# Altium PCB Emetteur.PcbDoc
Units mil, origin at the board's own origin, x right, y up, seen from the top; angles counter-clockwise.
Board outline 3820 x 1875 mil, 2 copper layers (Top Layer, Bottom Layer); 49 components, 25 nets, 112 pads, 24 vias.
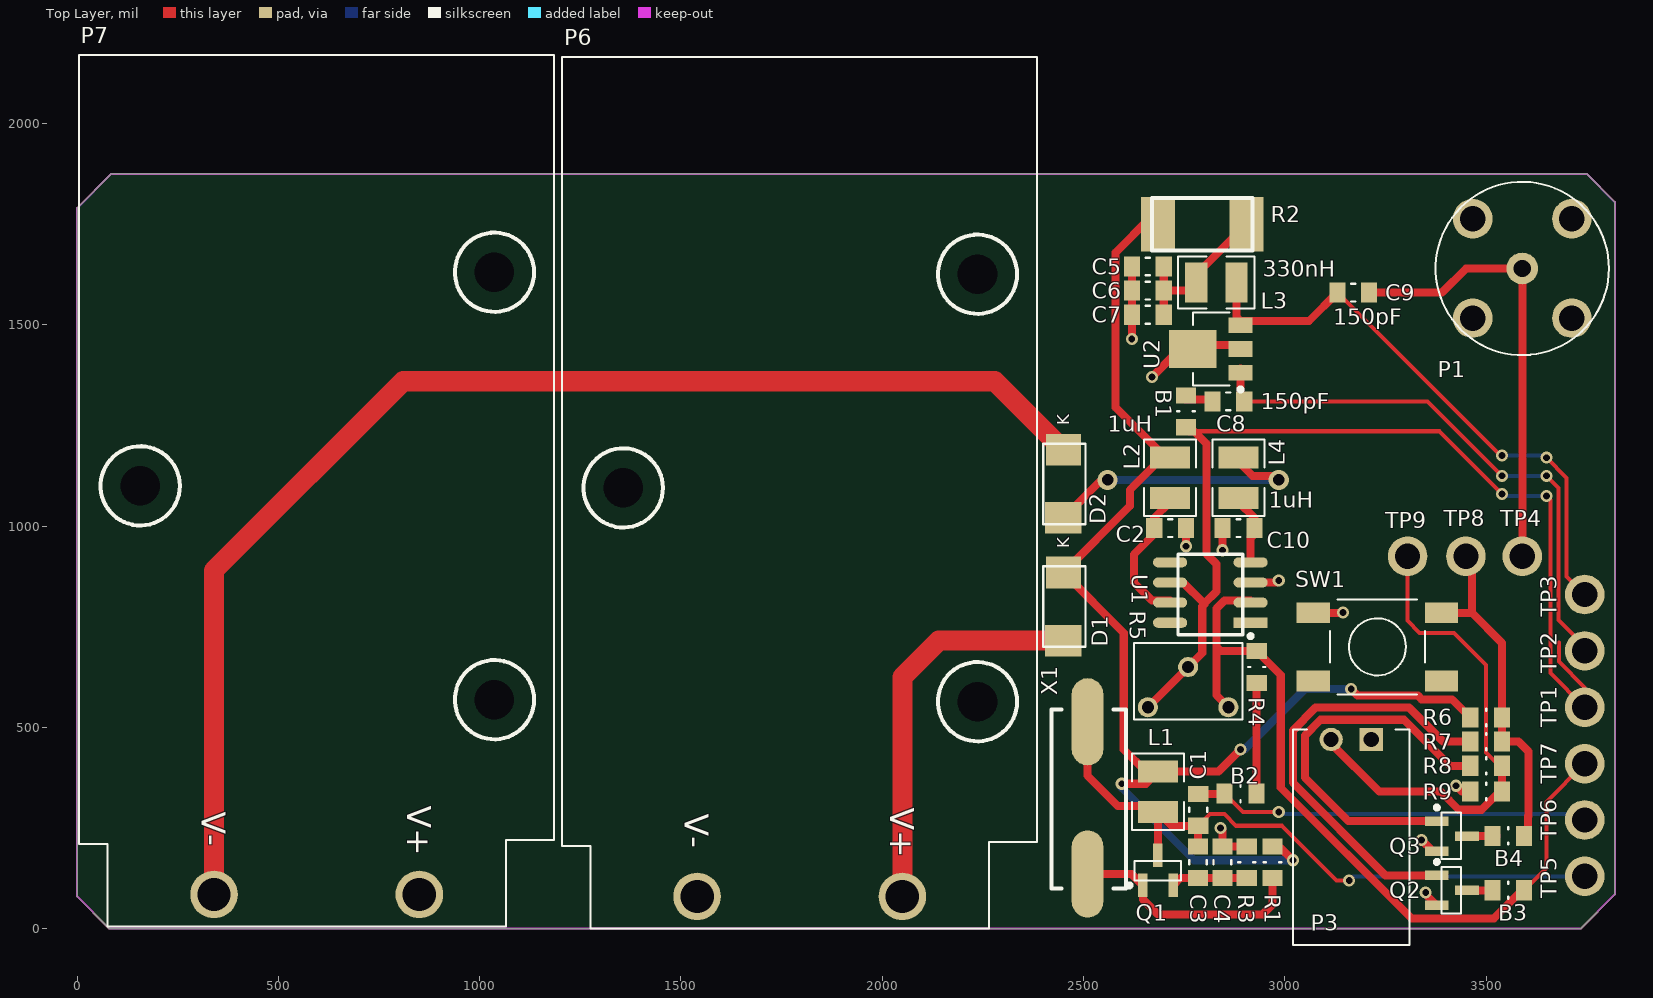
[diagram p0: Top Layer view]
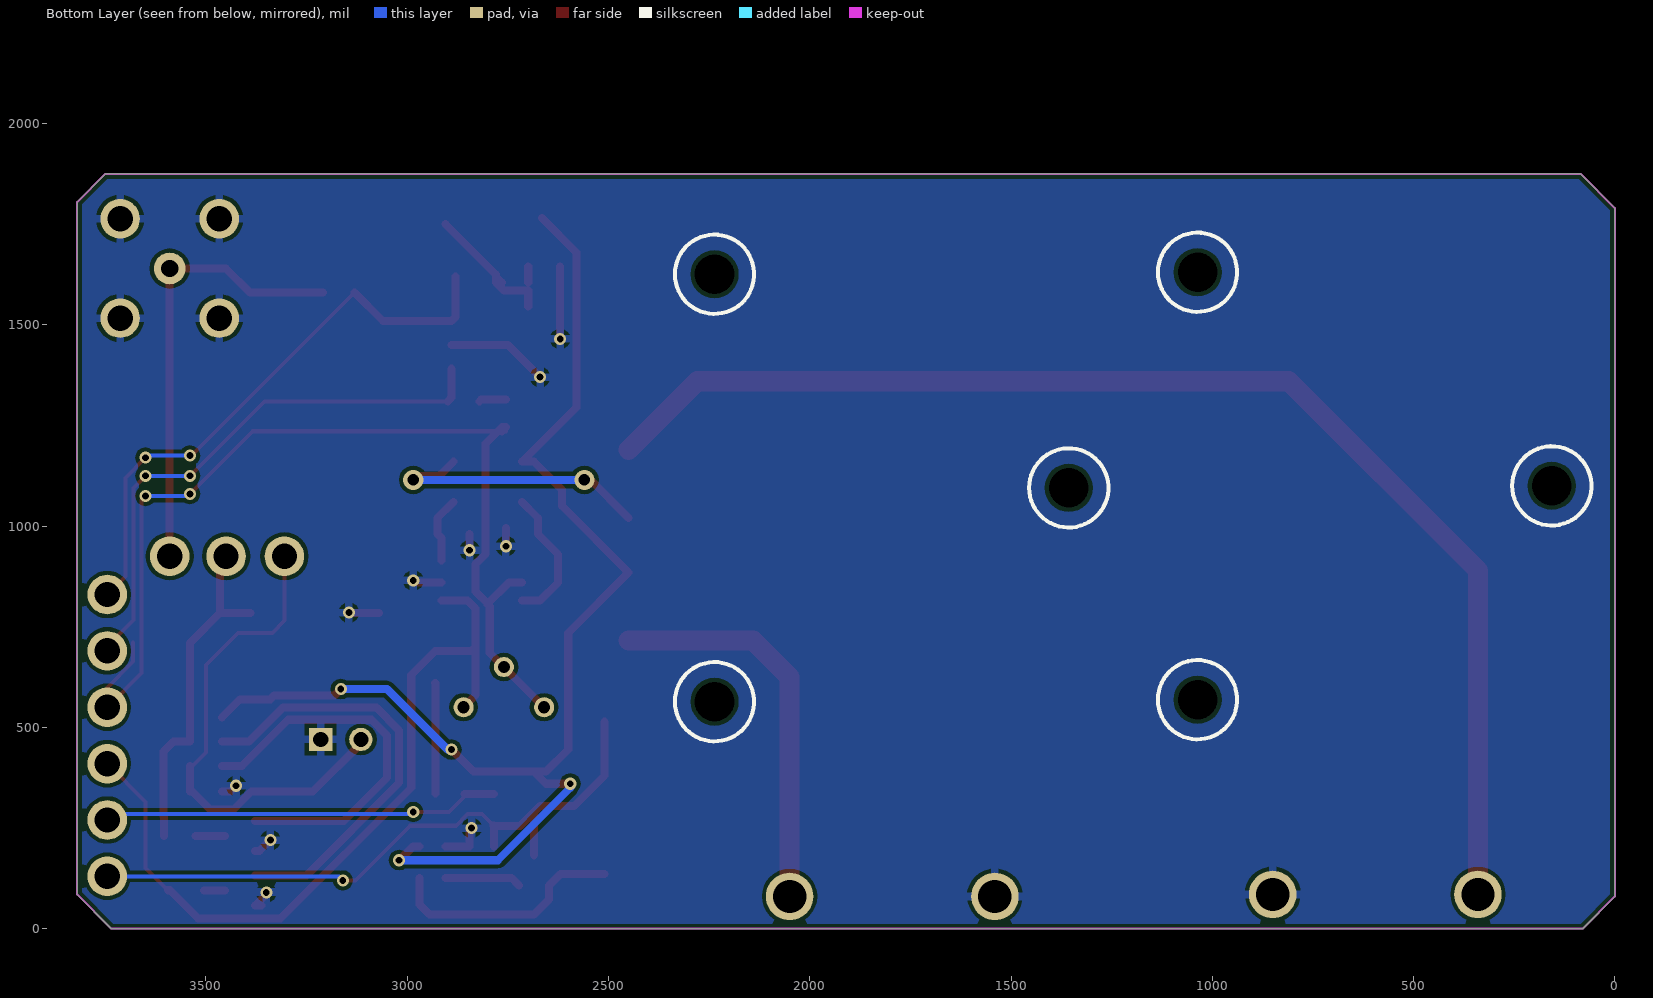
[diagram p1: Bottom Layer view, seen from below]
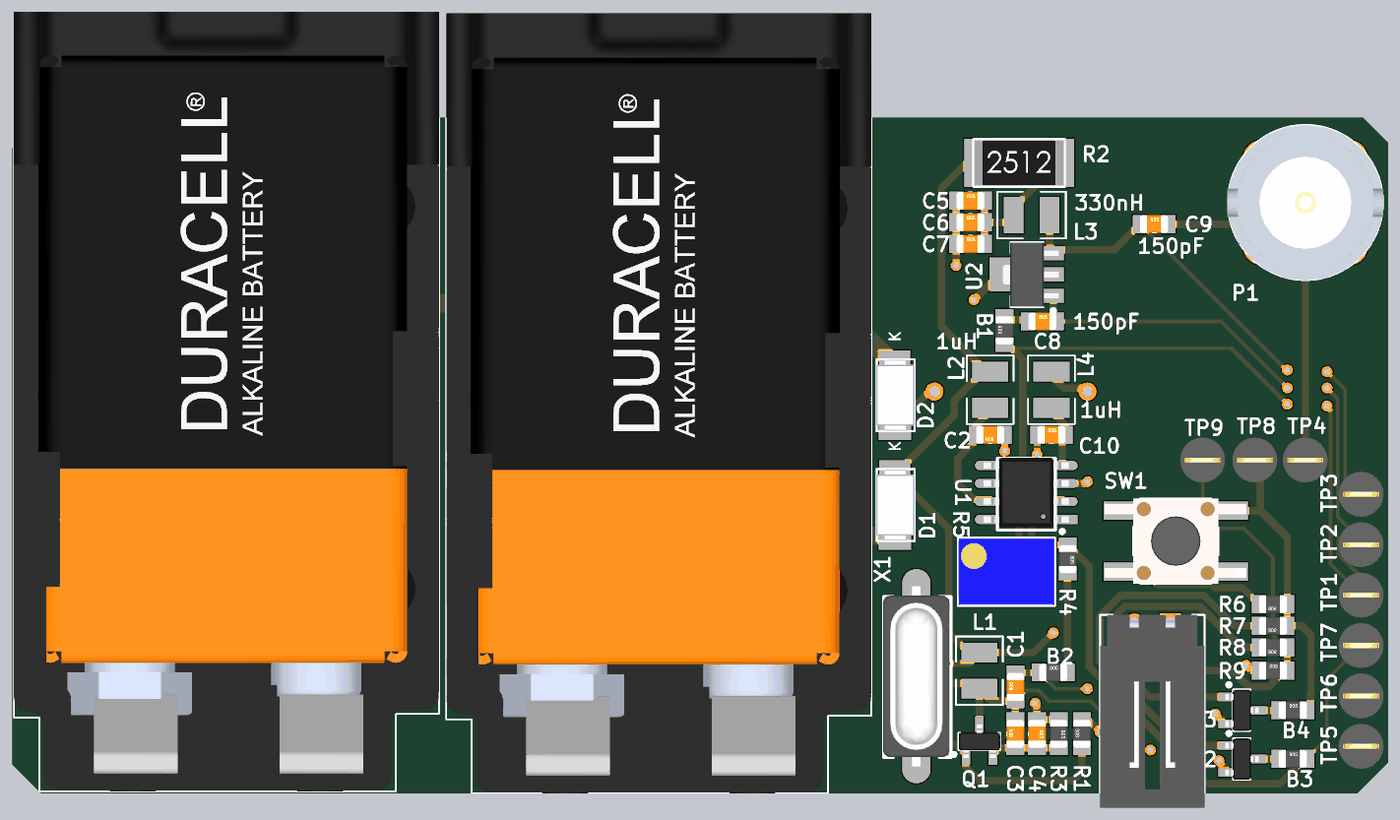
[diagram p2: 3D render of the assembled board from above, using the file's embedded part models]

## Layer stack, top to bottom
Top Layer: signal copper 1.4
Dielectric: dielectric 12.6, FR-4, Dk 4.8
Bottom Layer: signal copper 1.4

## Board outline
0,80 80,0 3735,0 3820,85 3820,1805 3750,1875 85,1875 0,1790

## Design rules (kind name [scope] priority, off if disabled: settings)
Clearance [All] p1: gap=10
MinimumSolderMaskSliver [All] p1 off: minsoldermaskwidth=10
PolygonConnect [All] p1: connectstyle=Relief reliefconductorwidth=20 reliefentries=4 polygonreliefangle="90 Angle"
RoutingVias [All] p1: holewidth=17 width=30 viastyle="Through Hole" minholewidth=17 minwidth=30 maxholewidth=28 maxwidth=50
SilkToSilkClearance [All] p1 off: silktosilkclearance=10
SilkscreenOverComponentPads [All] p1 off: minsilkscreentomaskgap=10
SolderMaskExpansion [All] p1: expansion=4
Width [All] p1: maxlimit=50 minlimit=10 preferedwidth=20
25 further rules are at their usual default settings.

## Components (designator, comment, footprint, x,y, rotation, side; value= is the part's Value field where it differs from the comment)
B1 "0" "0805 - Resistor" 2755,1285 r90 top
B2 "0" "0805 - Resistor" 2890,335 r0 top
B3 "0" "0805 - Resistor" 3555,95 r0 top
B4 "0" "0805 - Resistor" 3555,230 r0 top
C1 "Cap" "0805 - Cap Non-Polarized" 2785,295 r90 top
C2 "0.1uF" "0805 - Cap Non-Polarized" 2715,995 r180 top
C3 "Cap" "0805 - Cap Non-Polarized" 2784.61,165 r90 top
C4 "Cap" "0805 - Cap Non-Polarized" 2845,165 r270 top
C5 "2.2uF" "0805 - Cap Non-Polarized" 2660,1645 r0 top
C6 "1000pF" "0805 - Cap Non-Polarized" 2660,1585 r0 top
C7 "100pF" "0805 - Cap Non-Polarized" 2660,1525 r0 top
C8 "0.015uF" "0805 - Cap Non-Polarized" 2860,1310 r0 top
C9 "0.015uF" "0805 - Cap Non-Polarized" 3170,1580 r0 top
C10 "0.1uF" "0805 - Cap Non-Polarized" 2885,995 r0 top
D1 "Diode" "DOS-214AC (SMA)" 2450,800 r90 top
D2 "Diode" "DOS-214AC (SMA)" 2450,1105 r90 top
L1 "Inductor" "1008 - INDUCTOR" 2685,340 r90 top
L2 "1uH" "1008 - INDUCTOR" 2715,1120 r90 top
L3 "330nH" "1008 - INDUCTOR" 2830,1605 r180 top
L4 "1uH" "1008 - INDUCTOR" 2885,1120 r270 top
P1 "Coax-F" Coax-BNC-THT-Vertical 3590,1640 r0 top
P3 "Header 1X2" "Headers - 1x2 - R/A - Lock" 3215,470 r180 top
P6 "Battery Holder" "Battery Holder - 9V - THT" 2050,80 r270 top
P7 "Battery Holder" "Battery Holder - 9V - THT" 850,85 r270 top
Q1 "NPN" SOT23-3 2685,145 r90 top
Q2 "MOSFET_N" SOT23-3 3415,95 r0 top
Q3 "MOSFET_N" SOT23-3 3415,230 r0 top
R1 "Res" "0805 - Resistor" 2970,165 r90 top
R2 "36" "2512 - Resistor" 2795,1750 r0 top
R3 "Res" "0805 - Resistor" 2905,165 r270 top
R4 "2k" "0805 - Resistor" 2930,650 r270 top
R5 "Pot" TT-67Y 2660,550 r180 top
R6 "10k" "0805 - Resistor" 3500,525 r180 top
R7 "100" "0805 - Resistor" 3500,465 r180 top
R8 "100" "0805 - Resistor" 3500,405 r180 top
R9 "10k" "0805 - Resistor" 3500,340 r0 top
SW1 "Tact Switch 4" "TE FSMJSMA" 3230,700 r0 top
TP1 "TP" TP-THT-Vertical-1 3745,550 r0 top
TP2 "TP" TP-THT-Vertical-1 3745,690 r0 top
TP3 "TP" TP-THT-Vertical-1 3745,830 r0 top
TP4 "TP" TP-THT-Vertical-1 3590,925 r0 top
TP5 "TP" TP-THT-Vertical-1 3745,130 r0 top
TP6 "TP" TP-THT-Vertical-1 3745,270 r0 top
TP7 "TP" TP-THT-Vertical-1 3745,410 r0 top
TP8 "TP" TP-THT-Vertical-1 3450,925 r0 top
TP9 "TP" TP-THT-Vertical-1 3305,925 r0 top
U1 "LM7121" "SOIC8 - 0.150" 2915,760 r90 top
U2 "Buffer" SOT-89 2890,1440 r180 top
X1 "HC49US" HC49US 2510,325 r90 top

## Footprints (in the part's own frame and the unit in brackets; to place one, negate y for a bottom-side part, rotate by r counter-clockwise, add the part's x,y. Pads: shape width x height; smd on the part's side, far side on the other; paste and mask are expansions set on the pad)
"0805 - Cap Non-Polarized" [mil]
  rect 40x50 smd: 1(-39.38,-0.01) 2(39.36,-0.01)
  silkscreen extent -5,-22 5,22, body extent -39,-25 39,25, height 31
"0805 - Resistor" [mil]
  rect 40x50 smd: 1(-39.38,0.39) 2(39.36,0.39)
  silkscreen extent 0,-21 0,22, body extent -39,-24 39,25, height 31
"1008 - INDUCTOR" [mil]
  rect 55x100 smd: 1(-50,0) 2(50,0)
  silkscreen extent -95,-65 95,65, body extent -49,-39 49,39, height 71
"2512 - Resistor" [mil]
  rect 85x135 smd: 1(-110,0) 2(110,0)
  silkscreen extent -125,-65 125,65, body extent -124,-63 124,63, height 24
"Battery Holder - 9V - THT" [mm]
  round 3 hole 2.1: 1(0,0) 2(0,-12.95)
  round 2 hole 2.5 unplated: ""(-39.26,4.74) ""(-25.78,-17.61) ""(-12.29,4.74)
  Bottom Overlay keep-out circle w0.254: c-39.26,4.74 r2.5
  Bottom Overlay keep-out circle w0.254: c-12.29,4.74 r2.5
  Bottom Overlay keep-out circle w0.254: c-25.78,-17.61 r2.5
  silkscreen extent -52.96,-21.46 2.03,8.51, body extent -52.96,-21.46 2.03,8.51, height 21.31
Coax-BNC-THT-Vertical [mm]
  round 2 hole 1.1: 1(0,0)
  round 2.5 hole 1.6: 2(3.13,3.13) 3(-3.13,3.13) 4(-3.13,-3.13) 5(3.13,-3.13)
  silkscreen extent -5.46,-5.47 5.47,5.47, body extent -5.5,-5.52 5.5,5.48, height 13.7
"DOS-214AC (SMA)" [mm]
  rect 2x2.3 smd: 1(-2.148,0)
  rect 2x2.2 smd: 2(2.148,0)
  silkscreen extent -2.54,-1.4 2.54,1.27, body extent -2.5,-1.39 2.5,1.31, height 2.15
HC49US [mm]
  oval 5.5x2 smd: 1(-4.8,0) 2(4.8,0)
  silkscreen extent -5.71,-2.41 5.59,2.29, body extent -6.36,-2.35 6.34,2.35, height 4.2
"Headers - 1x2 - R/A - Lock" [mil]
  rect 58x58 hole 38: 1(0,0)
  round 58 hole 38: 2(100,0)
  silkscreen extent -95,-25 195,510, body extent -95,-25 195,510, height 280
"SOIC8 - 0.150" [mil]
  rect 25x85 smd: 1(0,0)
  oval 25x85 smd: 2(50,0) 3(100,0) 4(150,0) 5(150,200) 6(100,200) 7(50,200) 8(0,200)
  silkscreen extent -38,-5 170,180, body extent -21,-18 171,218, height 67
SOT23-3 [mm]
  rect 1.5x0.6 smd: 1(-0.95,0.95) 2(-0.95,-0.95) 3(0.95,0)
  silkscreen extent -1.07,-1.45 0.58,1.92, body extent -1.19,-1.46 1.15,1.46, height 1
SOT-89 [mm]
  rect 1.5x1 smd: 1(0,1.5) 2(0,0) 3(0,-1.5)
  rect 3x2.4 smd: 2(3,0)
  silkscreen extent -0.13,-2.3 3,2.67, body extent -0.38,-2.25 3.55,2.25, height 1.4
"TE FSMJSMA" [mm]
  rect 2.1x1.3 smd: 1(-4.05,2.15) 2(-4.05,-2.15) 3(4.05,2.15) 4(4.05,-2.15)
  silkscreen extent -3,-3 3,3, body extent -5,-3 5,3, height 5
TP-THT-Vertical-1 [mm]
  round 2.5 hole 1.6: 1(0,0)
  body extent -1.6,-1.59 1.57,1.59, height 5.65
TT-67Y [mil]
  round 50 hole 30: 1(0,0) 2(-100,-100) 3(-200,0)
  silkscreen extent -235,-160 35,30, body extent -234,-158 34,28, height 323

## Part data
B1 B2 B3 B4: library part Jumper-0805, "RES 0.0 OHM 1/8W JUMP 0805"
C1: library part Cap-TDK-CGA-150pF-0805, "CAP CER 150PF 250V 5% NP0 0603"
C2 C10: library part Cap-TDK-CGA-0.1uF-0805, "CAP CER 0.1UF 100V 10% X7R 0805"
C3: library part Cap-TDK-CGA-68pF-0805, "CAP CER 68PF 100V 5% NP0 0603"
C4: library part Cap-TDK-CGA-27pF-0805, "CAP CER 27PF 50V 5% NP0 0603"
C5: library part Cap-Samsung-CL-50V-2.2uF-0805-10%, "CAP CER 2.2UF 50V 10% X5R 0805"
C6: library part Cap-TDK-CGA-1000pF-0805, "CAP CER 1000PF 100V 5% NP0 0805"
C7: library part Cap-TDK-CGA-100pF-0805, "CAP CER 100PF 100V 5% NP0 0805"
C8 C9: library part Cap-TDK-CGA-0.015uF-0805, "CAP CER 0.015UF 100V X7R 0805"
D1 D2: library part S1M-13-F, "DIODE GEN PURPOSE 1000V 1A SMA"
L1: library part Murata-LQW2UA-Ind-AirCore-2.2uH, "IND 2200NH 280MA SRF 130MHZ 1008"
L2 L4: library part Murata-LQW2UA-Ind-AirCore-1uH, "IND 1000NH 370MA SRF 290MHZ 1008"
L3: library part Murata-LQW2UA-Ind-AirCore-330nH, "IND 330NH 450MA SRF 570MHZ 1008"
P1: library part coax-bnc-tht-vertical, "CONN BNC JACK STR 50 OHM PCB"
P3: library part Header-0.100-R/A-Lock-1X2
P6 P7: library part "Battery Holder-9V-THT-Open", "HOLDER BATTERY 9V PC MOUNT"
Q1: library part MMBT2222A-7-F, "TRANS NPN 40V 350MW SMD SOT23-3"
Q2 Q3: library part 2N7002, "MosFET Channel-N SOT-23-3 3.3A"
R1: library part Yagao-RC0805-100k, "RES 100K OHM 1/8W 5% 0805 SMD"
R2: library part Rohm-MCR100-36, "RES 36 OHM 1W 5% 2512 SMD"
R3 R7 R8: library part Yagao-RC0805-100, "RES 100 OHM 1/8W 5% 0805 SMD"
R4: library part Yagao-RC0805-2k, "RES 2.0K OHM 1/8W 5% 0805 SMD"
R5: library part Pot-TT67Y-20Turns-THT-10%-10k, "TRIMMER 10K OHM 0.5W TH"
R6 R9: library part Yagao-RC0805-10k, "RES 10K OHM 1/8W 5% 0805 SMD"
SW1: library part TactSwitch-SMD-Vertical-GullWing-6x6, "SWITCH TACTILE SPST-NO 0.05A 12V"
TP1 TP2 TP3 TP4 TP5 TP6 TP7 TP8 TP9: library part TP-THT-Vertical-1, "TEST POINT PC COMPACT .063\"D BLK"
U1: library part LM7121-8SOIC, "IC OPAMP VFB 175MHZ 8SOIC"
U2: library part HMC482ST89E-20dB, "IC MMIC AMP HBT 5GHZ SOT-89"
X1: library part TXC-9C-27MHz, "CRYSTAL 27MHZ 18PF SMD"

## Via types
v1: diameter 30, hole 17, Top Layer to Bottom Layer, 22 vias
v2: diameter 50, hole 28, Top Layer to Bottom Layer, 2 vias

## Nets (pads, with @x,y where several pads share a name; then routed paths per layer and width w, separated by ;. In a path a pad name is that pad's centre, name@x,y a point inside that pad or via, vN(x,y) a via of type N, cw(c..) or ccw(c..) an arc to the next point about the centre after c; other vN are vias at no path point)
+9V: D1.2 L1.2 L2.2 R1.2 R2.1 R6.2 | length 3274.7
  Top Layer w20: v1(2595,360) 2655,360 L1.2 ; R2.1@2665,1765 2580,1680 2580,1295 2715,1160 2685,1160 2615,1090 2615,1049.57 D1.2 2600,734.57 2600,445 2655,390 L1.2 ; v1(2890,445) 2835,390 L1.2 ; R1.2 2985.64,204.36 v1(3020,170) ; v1(3165,595) 3181,579 3330.59,579 3339.83,569.76 3415.49,569.76 R6.2
  Bottom Layer w20: v1(2595,360) 2595,350 2775,170 v1(3020,170) ; v1(2890,445) 2900,445 3050,595 v1(3165,595)
-9V: D2.1 L4.1 | length 692.8
  Top Layer w20: D2.1 2544.57,1115 v2(2560,1115) ; L4.1@2885,1160 2920,1125 2975,1125 v2(2985,1115)
  Bottom Layer w20: v2(2560,1115) v2(2985,1115)
COM: C2.1 C4.1 C5.1 C6.1 C7.1 C10.1 P1.2 P1.3 P1.4 P1.5 P3.1 P6.2 P7.1 Q2.2 Q3.2 R3.1 R9.1 SW1.1 U1.3 U2.2 | length 923.3
  Top Layer w20: v1(2620,1465) 2620.62,1465.62 C7.1 C6.1 C5.1 ; v1(2670,1370) 2750,1450 U2.2@2890,1450 ; C2.1 2755,994.38 v1(2755,950) ; v1(2840,250) 2844.99,245.01 C4.1 R3.1 ; v1(2845,940) 2845.62,940.62 C10.1@2845.62,979.99 ; U1.3 2980,860 v1(2985,865) ; SW1.1 3144.65,784.65 v1(3145,785) ; v1(3340,220) 3367.4,192.6 Q3.2 ; v1(3350,90) 3350,85.2 Q2.2 Q2.2@3362.4,57.6 ; v1(3425,355) 3439.61,340.39 R9.1
NetB1_1: B1.1 R5.1 R5.2 TP1.1 U1.6 | length 2637.7
  Top Layer w10: B1.1@2754.61,1235.62 2764.61,1235.62 2774.38,1235.62 3384.38,1235.62 v1(3540,1080) ; v1(3650,1075) 3660,1065 3660,635 TP1.1 3745,599.19 3680.79,663.4 3680.79,710.93
  Top Layer w20: R5.1 R5.2 2795,685 2795,800 2800,805 2800,807.43 ; U1.6 2747.43,860 2800,807.43 ; B1.1@2764.61,1235.62 B1.1 2764.38,1245.62 2774.38,1235.62 2805,1205 2805,930.5 2830,905.5 2830,837.43 2800,807.43
  Bottom Layer w10: v1(3540,1080) 3545,1075 v1(3650,1075)
NetB1_2: B1.2 C8.1 | length 67.8
  Top Layer w20: B1.2@2754.61,1314.36 2816.25,1314.36 C8.1
NetB2_1: B2.1 C1.2 TP6.1 | length 994.9
  Top Layer w10: B2.1 2851.65,334.36 2896.01,290 v1(2985,290)
  Top Layer w20: C1.2 2851.65,334.36 2857.55,334.36 B2.1@2858.19,335
  Bottom Layer w10: v1(2985,290) 2990,285 3730,285 TP6.1
NetB2_2: B2.2 R4.2 | length 275.7
  Top Layer w20: B2.2 2929.36,609.61 R4.2
NetB3_1: B3.1 Q2.3 | length 52.6
  Top Layer w20: Q2.3 B3.1@3505,95
NetB3_2: B3.2 R4.1 R5.3 TP7.1 U1.2 | length 1964
  Top Layer w10: B3.2 3650,151.02 3650,315 TP7.1
  Top Layer w20: R5.3 2830,580 2830,700 ; U1.2@2915,815 2850,815 2830,795 2830,700 ; B3.2 3588.91,95.39 3519.31,25.79 3314.36,25.79 2990,350.15 2990,629.76 R4.1 2840.62,689.38 2830,700
NetB4_1: B4.1 Q3.3 | length 73.4
  Top Layer w20: Q3.3 3525.24,230 B4.1@3525.62,230.39
NetB4_2: B4.2 R6.1 R7.1 SW1.3 TP8.1 | length 859.5
  Top Layer w20: SW1.3 3465.35,784.65 ; TP8.1 3465.35,909.65 3465.35,784.65 ; B4.2@3604.36,230.39 3604.36,279.36 3605,280 3605,440 3580.39,464.61 R7.1 R6.1 3539.38,709.38 3540,710 3465.35,784.65
NetC1_1: C1.1 C3.2 L1.1 Q1.3 TP5.1 X1.2 | length 1663.9
  Top Layer w10: C1.1 2814.38,285 2850,285 2879.38,255.62 2993.35,255.62 3128.98,120 v1(3160,120)
  Top Layer w20: X1.2 2510,380 2585,305 2670,305 L1.1 ; Q1.3 L1.1 ; C3.2 C1.1@2784.62,255.24 ; C1.1 C1.1@2784.62,255.24 ; L1.1 2719.76,255.24 C1.1@2784.62,255.24
  Bottom Layer w10: v1(3160,120) 3170,130 TP5.1
NetC2_2: C2.2 L2.1 U1.7 | length 345.9
  Top Layer w20: U1.7@2715,815 2670,815 2625,860 2625,929.37 2675.64,980.01 2675.64,1020.64 L2.1@2715,1060
NetC3_1: C3.1 C4.2 Q1.2 R3.2 | length 190.5
  Top Layer w20: Q1.2 2740.44,125.64 C4.2 R3.2
NetC5_2: C5.2 C6.2 C7.2 L3.2 R2.2 | length 386.9
  Top Layer w20: C7.2@2699.36,1544.99 C6.2 2759.99,1584.99 L3.2 L3.2@2780,1620 ; C6.2@2699.36,1604.99 C5.2 ; L3.2@2764.99,1604.99 L3.2@2780,1620 ; R2.2 2780,1625 L3.2@2780,1620
NetC8_2: C8.2 TP2.1 U2.1 | length 1401.4
  Top Layer w10: C8.2 3355.01,1309.99 v1(3540,1125) ; v1(3650,1125) 3680,1095 3680,766.57 3745,701.57 TP2.1 TP2.1@3730,690
  Top Layer w20: U2.1@2890,1390.94 2890,1319.36 C8.2
  Bottom Layer w10: v1(3540,1125) v1(3650,1125)
NetC9_1: C9.1 L3.1 TP3.1 U2.3 | length 1463.6
  Top Layer w10: C9.1 3535.62,1175 v1(3540,1175) ; v1(3650,1170) 3700,1120 3700,875 TP3.1
  Top Layer w20: L3.1@2880,1620 2880,1519.05 2890,1509.05 3059.68,1509.05 C9.1
  Bottom Layer w10: v1(3540,1175) 3655,1175 v1(3650,1170)
NetC9_2: C9.2 P1.1 TP4.1 | length 1120.5
  Top Layer w20: C9.2 3390.64,1579.99 3450.64,1640 P1.1 TP4.1
NetC10_2: C10.2 L4.2 U1.4 | length 165.2
  Top Layer w20: L4.2@2885,1060 2924.36,1020.64 2924.36,979.99 2915,970.63 U1.4@2915,915
NetD1_1: D1.1 P6.1 | length 982.5
  Top Layer w50: P6.1 2050,625 2140.43,715.43 D1.1
NetD2_2: D2.2 P7.2 | length 3180.2
  Top Layer w50: P7.2 340.16,890.16 810,1360 2279.57,1360 D2.2
NetP3_2: P3.2 R8.1 R9.2 TP9.1 | length 1256.3
  Top Layer w10: TP9.1 3305,765 3335,735 3420,735 3500,655 3500,437.78 3533.16,404.61 R8.1
  Top Layer w20: P3.2 3115,460 3234.61,340.39 3387.34,340.39 3432.34,295.39 3488.91,295.39 3533.91,340.39 R9.2 R8.1
NetQ1_1: Q1.1 R1.1 X1.1 | length 598.3
  Top Layer w20: X1.1 2619.17,136.02 Q1.1 2647.6,72.4 2685,35 2945,35 2969.61,59.61 R1.1
NetQ2_1: Q2.1 R7.2 | length 1081.8
  Top Layer w20: Q2.1 3250.17,132.4 3020,362.57 3020,492.43 3076.57,549 3308.43,549 3392.81,464.61 R7.2
NetQ3_1: Q3.1 R8.2 | length 951.3
  Top Layer w20: Q3.1 3157.6,267.4 3050,375 3050,480 3089,519 3296,519 3410.39,404.61 R8.2
pads on no net: P6. P7. SW1.2 SW1.4 U1.1 U1.5 U1.8

## Polygon pours and split planes (outlines as drawn)
COM on Bottom Layer "GND Plane" (solid, pour order 2): 3820,85 3820,1805 3750,1875 85,1875 0,1790 0,80 80,0 3735,0 3820,85

## Keep-outs
Keep-Out Layer:
  the board outline again, w5

## Silkscreen, mask and mechanical layers (free items; w line width, h text height)
Top Overlay:
  text "330nH" at 2945,1620 h40
  text "150pF" at 3120,1500 h40
  text "150pF" at 2940,1290 h40
  text "1uH" at 2560,1235 h40
  text "1uH" at 2960,1045 h40

## Dimensions
0,0 to 85,1875 on Mechanical 1
0,0 to 3820,0 on Mechanical 1

## Text inside footprints (layer, text, board x,y; h text height)
D1: Top Overlay "K" at 2465,945 h30 r90
D2: Top Overlay "K" at 2465,1250 h30 r90
P6: Top Overlay "V+" at 2020,300 h60 r270; Top Overlay "V-" at 1510,285 h60 r270
P7: Top Overlay "V+" at 820,305 h60 r270; Top Overlay "V-" at 310,290 h60 r270